# Allegro board Freescale_v1_4.brd
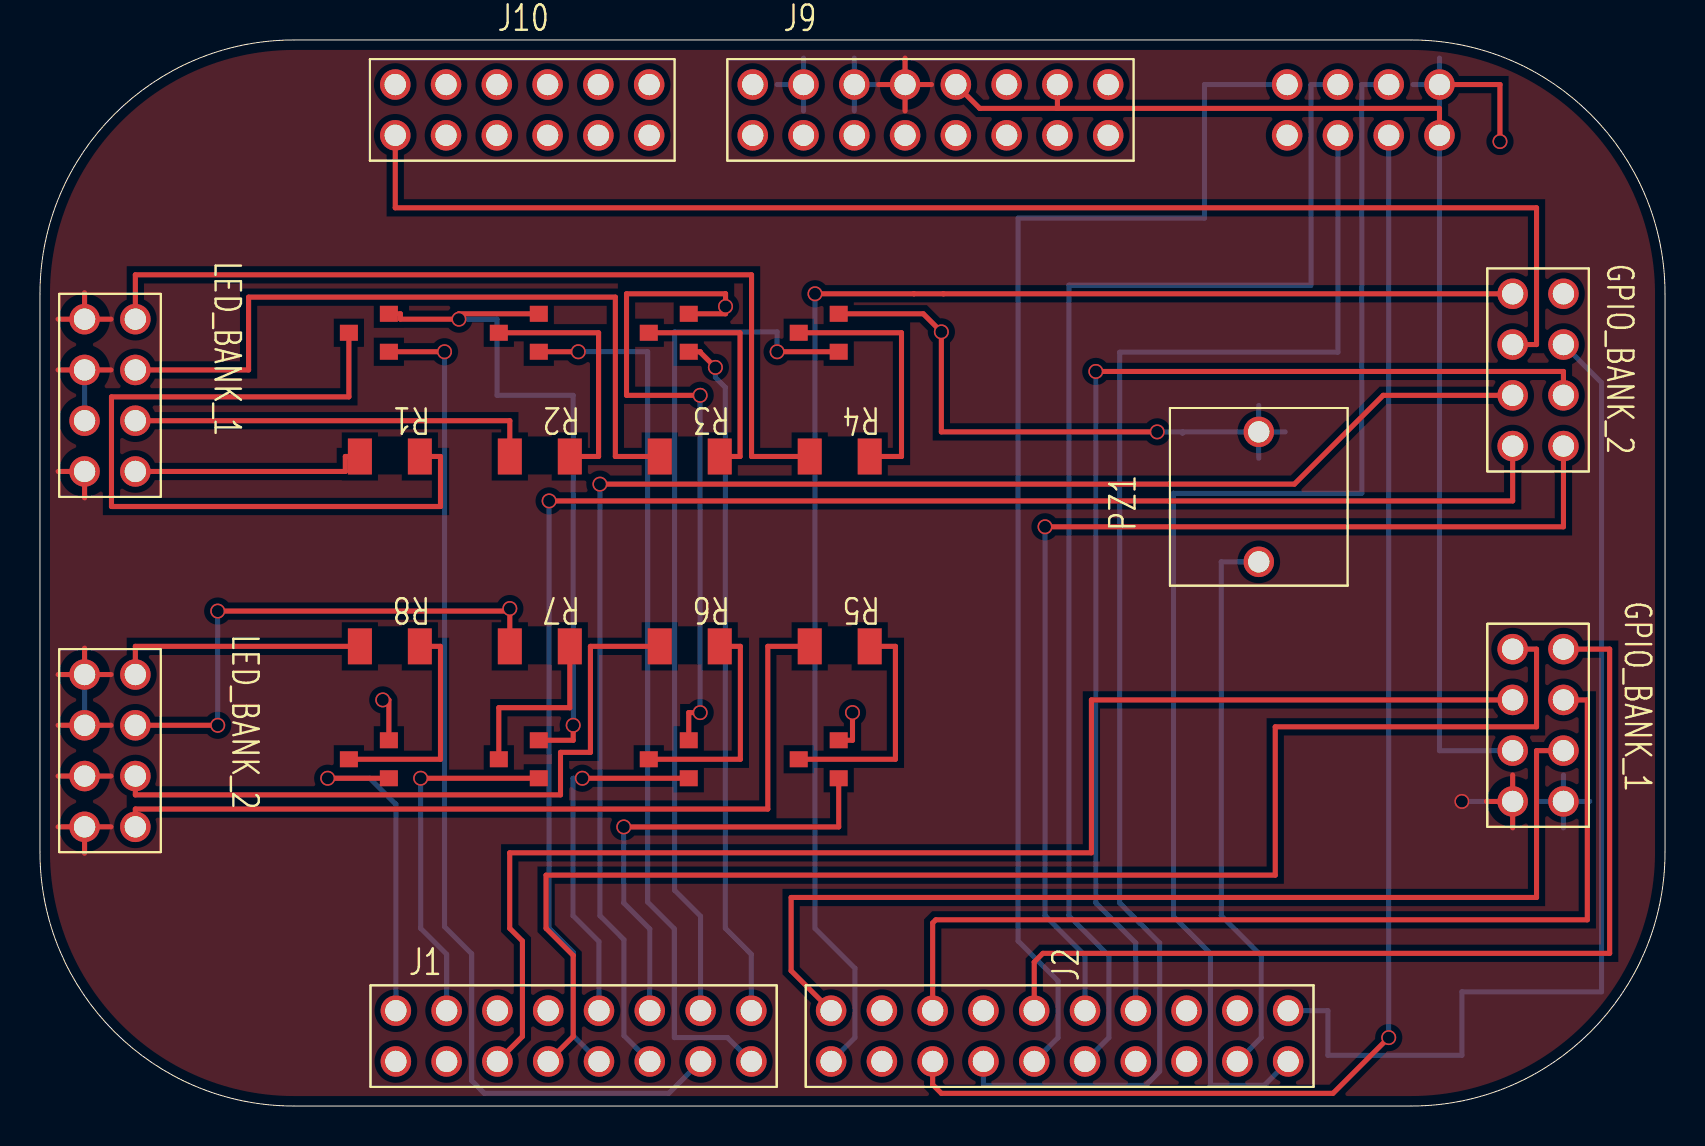
[diagram p0: board, top side]
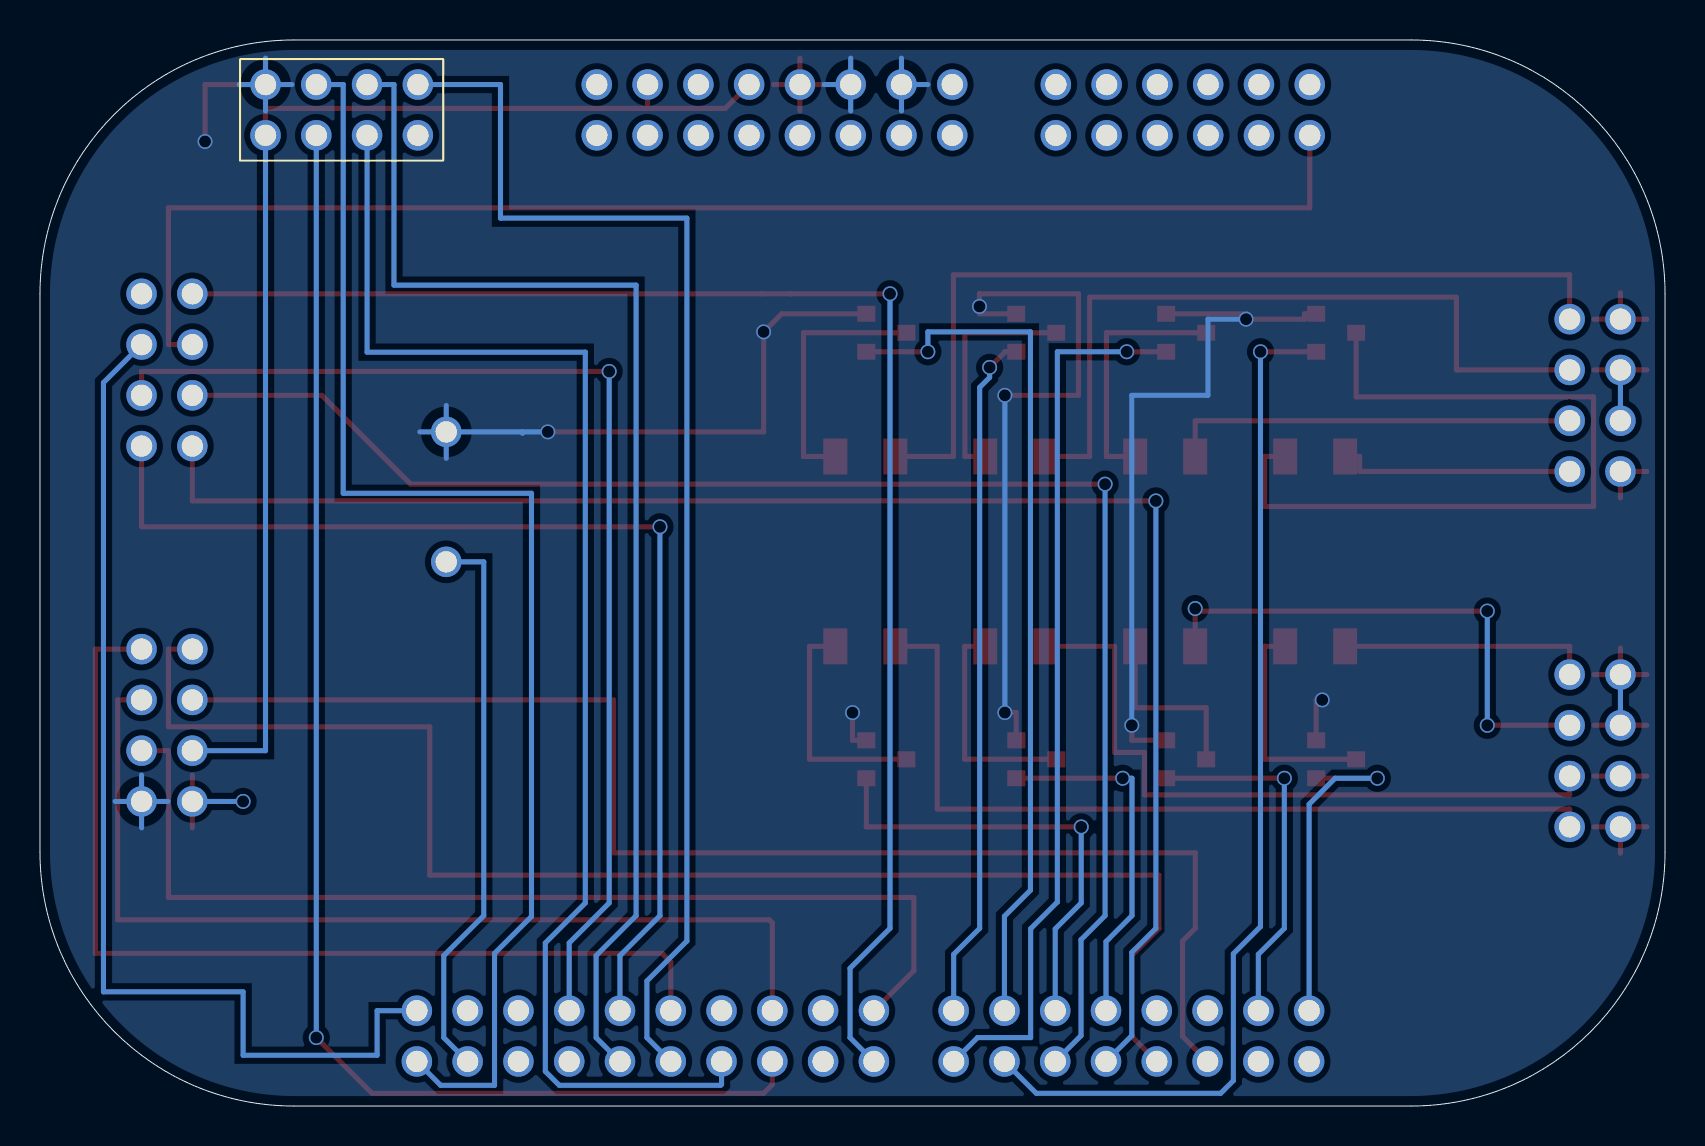
[diagram p1: board, bottom side, seen from below]

Outline 81.28 x 53.34 mm; copper layers: TOP, BOTTOM. Coordinates in mm from the lower left corner of the outline.
Outline path: 0,40.64 arc(3.72,49.62) 12.7,53.34 68.58,53.34 arc(77.56,49.62) 81.28,40.64 81.28,12.7 arc(77.56,3.72) 68.58,0 12.7,0 arc(3.72,3.72) 0,12.7 0,40.64

## Placement (name value [footprint] x y rotation side)
GPIO_BANK_1  HEADER 4X2  [JUMPER8]  73.66 15.24 0 top
GPIO_BANK_2  HEADER 4X2  [JUMPER8]  73.66 33.02 0 top
J1  HEADER 8X2  [JUMPER16]  17.8 2.23 0 top
J2  HEADER 10X2  [JUMPER20]  51 3.5 90 top
J9  J9  [JUMPER16]  35.65 48.57 0 top
J10  HEADER 6x2/SM  [JUMPER12]  24.12 49.84 90 top
J11  HEADER 4X2  [JUMPER8]  70 51.11 270 bottom
LED_BANK_1  HEADER 4X2  [JUMPER8]  2.23 31.75 0 top
LED_BANK_2  HEADER 4X2  [JUMPER8]  2.23 13.97 0 top
PZ1  PIEZO BUZZER_2  [DTH6-5MM]  60.96 30.48 90 top
Q1  MOSFET N  [TRANS]  37.5 37.34 0 top
Q2  MOSFET N  [TRANS]  30 37.34 0 top
Q3  MOSFET N  [TRANS]  22.5 37.34 0 top
Q4  MOSFET N  [TRANS]  15 37.34 0 top
Q5  MOSFET N  [TRANS]  37.5 16 0 top
Q6  MOSFET N  [TRANS]  30 16 0 top
Q7  MOSFET N  [TRANS]  22.5 16 0 top
Q8  MOSFET N  [TRANS]  15 16 0 top
R1  200  [SMD_RES_1206]  17.5 32.5 180 top
R2  200  [SMD_RES_1206]  25 32.5 180 top
R3  200  [SMD_RES_1206]  32.5 32.5 180 top
R4  200  [SMD_RES_1206]  40 32.5 180 top
R5  200  [SMD_RES_1206]  40 23 180 top
R6  200  [SMD_RES_1206]  32.5 23 180 top
R7  200  [SMD_RES_1206]  25 23 180 top
R8  200  [SMD_RES_1206]  17.5 23 180 top

## Library data of the parts
GPIO_BANK_1 GPIO_BANK_2 J11 LED_BANK_1 LED_BANK_2 = HEADER 4X2: User Part Number: ***
J1 J9 = HEADER 8X2_0: User Part Number: ***
J2 = HEADER 10X2_0
J10 = HEADER 6x2/SM_0
PZ1 = PIEZO BUZZER_0
Q1-Q8 = MOSFET N_1
R1-R8 = R

## Footprints (pads in the part's own frame, mm; a bottom-side part is the same pattern mirrored in y, then rotated)
DTH6-5MM
  round 1.524 hole 1.067: 1(-3.251,0) 2(3.251,0)
JUMPER8
  round 1.524 hole 1.067: 1(0,0) 2(2.54,0) 3(0,2.54) 4(2.54,2.54) 5(0,5.08) 6(2.54,5.08) 7(0,7.62) 8(2.54,7.62)
JUMPER12
  round 1.524 hole 1.067: 1(-1.27,6.35) 2(-1.27,3.81) 3(-1.27,1.27) 4(-1.27,-1.27) 5(-1.27,-3.81) 6(-1.27,-6.35) 7(1.27,-6.35) 8(1.27,-3.81) 9(1.27,-1.27) 10(1.27,1.27) 11(1.27,3.81) 12(1.27,6.35)
JUMPER16
  round 1.524 hole 1.067: 1(0,0) 2(2.54,0) 3(5.08,0) 4(7.62,0) 5(10.16,0) 6(12.7,0) 7(15.24,0) 8(17.78,0) 9(0,2.54) 10(2.54,2.54) 11(5.08,2.54) 12(7.62,2.54) 13(10.16,2.54) 14(12.7,2.54) 15(15.24,2.54) 16(17.78,2.54)
JUMPER20
  round 1.524 hole 1.067: 1(-1.27,11.43) 2(-1.27,8.89) 3(-1.27,6.35) 4(-1.27,3.81) 5(-1.27,1.27) 6(-1.27,-1.27) 7(-1.27,-3.81) 8(-1.27,-6.35) 9(-1.27,-8.89) 10(-1.27,-11.43) 11(1.27,-11.43) 12(1.27,-8.89) 13(1.27,-6.35) 14(1.27,-3.81) 15(1.27,-1.27) 16(1.27,1.27) 17(1.27,3.81) 18(1.27,6.35) 19(1.27,8.89) 20(1.27,11.43)
SMD_RES_1206
  rect 1.2x1.8 smd: 1(-1.5,0) 2(1.5,0)
TRANS
  rect 0.9x0.8 smd: 2(0.45,1.35) 4(2.45,2.3) 6(2.45,0.4)

## Nets
3.3V: GPIO_BANK_1.3 J9.13 J9.15 J11.2
5V: GPIO_BANK_1.1 J9.12 LED_BANK_1.1 LED_BANK_1.3 LED_BANK_1.5 LED_BANK_1.7 LED_BANK_2.1 LED_BANK_2.3 LED_BANK_2.5 LED_BANK_2.7
GND: GPIO_BANK_1.2 J9.10 J9.11 J11.1 PZ1.2 Q1.4(EMMITER) Q2.4(EMMITER) Q3.4(EMMITER) Q4.4(EMMITER) Q5.4(EMMITER) Q6.4(EMMITER) Q7.4(EMMITER) Q8.4(EMMITER)
GPIO-1: GPIO_BANK_1.4 J2.20
GPIO-2: GPIO_BANK_1.5 J1.3
GPIO-3: GPIO_BANK_1.6 J2.18
GPIO-4: GPIO_BANK_1.7 J1.4
GPIO-5: GPIO_BANK_1.8 J2.16
GPIO-6: GPIO_BANK_2.1 J1.5
GPIO-7: GPIO_BANK_2.2 J2.15
GPIO-8: GPIO_BANK_2.3 J1.6
GPIO-9: GPIO_BANK_2.4 J2.14
GPIO-10: GPIO_BANK_2.5 J10.1
GPIO-11: GPIO_BANK_2.6 J2.11
GPIO-12: GPIO_BANK_2.7 J2.1
LED-1: J1.7 Q4.6(BASE)
LED-2: J1.8 Q3.6(BASE)
LED-3: J1.16 Q2.6(BASE)
LED-4: J1.15 Q1.6(BASE)
LED-5: J1.14 Q5.6(BASE)
LED-6: J1.13 Q6.6(BASE)
LED-7: J1.10 Q7.6(BASE)
LED-8: J1.9 Q8.6(BASE)
PIEZO: J2.9 PZ1.1
RF-CE: J2.10 J11.3
RF-CSN: J2.3 J11.4
RF-MISO: J2.5 J11.7
RF-MOSI: J2.4 J11.6
RF-SCK: J2.6 J11.5
N09708: LED_BANK_1.4 R2.2
N10812: LED_BANK_1.6 R3.2
N10920: LED_BANK_1.8 R4.2
N11781: Q1.2(COLLECTOR) R4.1
N11991: LED_BANK_1.2 R1.2
N12934: LED_BANK_2.6 R7.2
N12980: LED_BANK_2.4 R6.2
N13010: LED_BANK_2.2 R5.2
N13042: Q5.2(COLLECTOR) R5.1
N13078: LED_BANK_2.8 R8.2
N096061: Q4.2(COLLECTOR) R1.1
N097021: Q3.2(COLLECTOR) R2.1
N107951: Q2.2(COLLECTOR) R3.1
N129261: Q8.2(COLLECTOR) R8.1
N129501: Q7.2(COLLECTOR) R7.1
N129721: Q6.2(COLLECTOR) R6.1

Pads without a net: GPIO_BANK_2 8; J1 1 2 11 12; J2 2 7 8 12 13 17 19; J9 1 2 3 4 5 6 7 8 9 14 16; J10 2 3 4 5 6 7 8 9 10 11 12; J11 8

## Via types
v1: diameter 0.75, hole 0.6, TOP to BOTTOM, 28 vias

## Routing (per net, layer and track width the routed paths; a pad name or vN(x,y) marks a point on that pad's centre or on a via; arc(x,y) is an arc through that point)
3.3V: length 61.7
  TOP w0.254: 50.89,49.93 50.87,49.92 47,49.92 J9.13 ; 50.89,49.93 50.91,49.92 70,49.92 J11.2 ; 50.89,49.93 J9.15
  BOTTOM w0.254: J11.2 70,17.78 GPIO_BANK_1.3
5V: length 39.3
  TOP w0.254: LED_BANK_1.7 2.23,40.69 ; LED_BANK_1.7 0.91,39.37 ; LED_BANK_1.7 3.55,39.37 ; 0.91,13.97 LED_BANK_2.1 ; LED_BANK_2.1 2.23,12.65 ; LED_BANK_2.1 3.55,13.97 ; J9.12 44.59,51.11 ; J9.12 41.95,51.11 ; J9.12 43.27,52.43 ; J9.12 43.27,49.79 ; 3.55,16.51 LED_BANK_2.3 0.91,16.51 ; 0.91,19.05 LED_BANK_2.5 3.55,19.05 ; 0.91,36.83 LED_BANK_1.5 3.55,36.83 ; 0.91,21.59 LED_BANK_2.7 ; LED_BANK_2.7 2.23,22.91 ; LED_BANK_2.7 3.55,21.59 ; 2.23,30.43 LED_BANK_1.1 0.91,31.75 ; GPIO_BANK_1.1 73.66,16.56 ; GPIO_BANK_1.1 72.34,15.24 ; GPIO_BANK_1.1 73.66,13.92
  BOTTOM w0.254: LED_BANK_1.5 LED_BANK_1.3 ; LED_BANK_2.5 LED_BANK_2.7 ; GPIO_BANK_1.1 v1(71.12,15.24)
GND: length 130.2
  TOP w0.254: Q2.4 34.29,39.64 v1(34.29,40.01) 34.29,40.64 34.29,40.64 34.29,40.64 29.34,40.64 29.34,35.56 v1(33.02,35.56) ; Q4.4 18.03,39.64 18.03,39.37 v1(20.95,39.37) 20.95,39.64 Q3.4 ; v1(73.03,48.26) 73.03,51.11 J11.1 ; Q6.4 32.45,19.68 v1(33.02,19.68) ; Q5.4 40.64,18.3 v1(40.64,19.68) ; Q1.4 44.18,39.64 v1(45.09,38.73) 45.09,33.73 v1(55.88,33.73) ; Q7.4 26.67,18.3 v1(26.67,19.05) ; v1(17.14,20.32) 17.45,20.32 Q8.4
  BOTTOM w0.254: 38.19,49.79 J9.10 ; J9.10 38.19,52.43 ; J9.10 36.87,51.11 ; v1(33.02,19.68) v1(33.02,35.56) ; 70,49.79 J11.1 ; J11.1 68.68,51.11 ; J11.1 70,52.43 ; J11.1 71.32,51.11 ; v1(20.95,39.37) 22.86,39.37 22.86,35.56 26.67,35.56 v1(26.67,19.05) ; PZ1.2 62.28,33.73 ; PZ1.2 57.15,33.73 ; PZ1.2 60.96,32.41 ; PZ1.2 60.96,35.05 ; 57.15,33.73 v1(55.88,33.73) 55.88,33.66 ; 57.15,33.73 57.15,33.66 ; 40.73,49.79 J9.11 ; J9.11 40.73,52.43 ; J9.11 42.05,51.11 ; 74.88,15.24 GPIO_BANK_1.2 ; GPIO_BANK_1.2 77.52,15.24 ; GPIO_BANK_1.2 76.2,16.56 ; GPIO_BANK_1.2 76.2,13.92
GPIO-1: length 52.5
  TOP w0.254: GPIO_BANK_1.4 74.85,17.78 74.85,10.43 37.57,10.43 37.57,6.77 J2.20
GPIO-2: length 69
  TOP w0.254: J1.3 24.13,3.48 24.13,8.26 23.5,8.89 23.5,12.67 52.59,12.67 52.59,20.32 GPIO_BANK_1.5
GPIO-3: length 49.4
  TOP w0.254: GPIO_BANK_1.6 77.39,20.32 77.39,9.32 44.81,9.32 44.65,9.16 J2.18
GPIO-4: length 72.4
  TOP w0.254: J1.4 26.67,3.48 26.67,7.53 25.31,8.89 25.31,11.55 61.78,11.55 61.78,18.97 74.85,18.97 74.85,22.86 GPIO_BANK_1.7
GPIO-5: length 48.9
  TOP w0.254: GPIO_BANK_1.8 78.51,22.86 78.51,7.64 50.16,7.64 49.73,7.21 J2.16
GPIO-6: length 80
  TOP w0.254: v1(25.47,30.28) 73.66,30.28 GPIO_BANK_2.1
  BOTTOM w0.254: J1.5 26.67,3.52 26.67,7.69 25.47,8.89 v1(25.47,30.28)
GPIO-7: length 55
  TOP w0.254: v1(50.27,28.98) 76.2,28.98 GPIO_BANK_2.2
  BOTTOM w0.254: J2.15 52.27,7.53 50.27,9.53 v1(50.27,28.98)
GPIO-8: length 77.4
  TOP w0.254: GPIO_BANK_2.3 67.18,35.56 62.74,31.11 v1(28.01,31.11)
  BOTTOM w0.254: v1(28.01,31.11) 28.01,9.53 29.21,8.32 29.21,3.52 J1.6
GPIO-9: length 57.4
  TOP w0.254: GPIO_BANK_2.4 76.2,36.75 v1(52.81,36.75)
  BOTTOM w0.254: v1(52.81,36.75) 52.81,10.16 54.81,8.16 J2.14
GPIO-10: length 68.7
  TOP w0.254: J10.1 17.77,44.94 74.85,44.94 74.85,38.1 GPIO_BANK_2.5
GPIO-11: length 54.3
  BOTTOM w0.254: J2.11 64.42,4.77 64.42,2.54 71.12,2.54 71.12,5.71 78.11,5.71 78.11,36.2 GPIO_BANK_2.6
GPIO-12: length 74.6
  TOP w0.254: v1(38.76,40.64) 43.71,40.64 GPIO_BANK_2.7
  BOTTOM w0.254: v1(38.76,40.64) 38.76,8.89 40.76,6.89 40.76,3.42 J2.1
LED-1: length 52.2
  TOP w0.254: Q4.6 v1(20.23,37.74)
  BOTTOM w0.254: v1(20.23,37.74) 20.23,8.98 21.59,7.62 21.59,1.27 22.23,0.64 31.45,0.64 J1.7
LED-2: length 44.7
  TOP w0.254: Q3.6 v1(26.92,37.74)
  BOTTOM w0.254: J1.8 34.39,3.42 31.73,3.42 31.73,8.87 30.39,10.21 30.39,37.74 v1(26.92,37.74)
LED-3: length 34.6
  TOP w0.254: v1(33.78,36.96) 33.03,37.71 33.03,37.73 33.02,37.74 Q2.6
  BOTTOM w0.254: v1(33.78,36.96) 33.78,36.45 34.28,35.96 34.28,8.89 35.58,7.59 J1.16
LED-4: length 43.7
  TOP w0.254: Q1.6 v1(36.87,37.74)
  BOTTOM w0.254: J1.15 33.04,9.49 31.74,10.79 31.74,38.73 36.87,38.73 v1(36.87,37.74)
LED-5: length 22.9
  TOP w0.254: Q5.6 39.95,13.96 v1(29.2,13.96)
  BOTTOM w0.254: v1(29.2,13.96) 29.2,10.16 30.5,8.86 J1.14
LED-6: length 18
  TOP w0.254: Q6.6 v1(27.13,16.4)
  BOTTOM w0.254: J1.13 27.96,8.22 26.66,9.53 26.66,16.4 v1(27.13,16.4)
LED-7: length 18.1
  TOP w0.254: Q7.6 v1(19.04,16.4)
  BOTTOM w0.254: v1(19.04,16.4) 19.04,8.89 20.34,7.59 J1.10
LED-8: length 17.3
  TOP w0.254: Q8.6 v1(14.39,16.4)
  BOTTOM w0.254: J1.9 17.8,15.1 16.5,16.4 v1(14.39,16.4)
PIEZO: length 28.2
  BOTTOM w0.254: J2.9 61.08,3.42 61.08,7.53 59.08,9.53 59.08,27.23 PZ1.1
RF-CE: length 66
  BOTTOM w0.254: J11.3 66.11,51.11 66.11,30.66 56.7,30.66 56.7,9.48 58.54,7.63 58.54,1.04 61.24,1.04 J2.10
RF-CSN: length 70.5
  TOP w0.254: v1(67.46,3.42) 64.67,0.64 45.09,0.64 44.65,1.07 J2.3
  BOTTOM w0.254: J11.4 v1(67.46,3.42)
RF-MISO: length 63.7
  BOTTOM w0.254: J11.7 58.25,51.11 58.25,44.42 48.92,44.42 48.92,8.26 50.92,6.25 50.92,3.42 J2.5
RF-MOSI: length 68.8
  BOTTOM w0.254: J11.6 64.92,37.72 54,37.72 54,10.16 56,8.16 56,1.74 55.3,1.04 47.24,1.04 47.19,1.09 J2.4
RF-SCK: length 63.7
  BOTTOM w0.254: J11.5 63.57,51.11 63.57,41.07 51.46,41.07 51.46,9.53 53.46,7.53 53.46,3.42 J2.6
N09708: length 20.5
  TOP w0.254: R2.2 23.5,34.29 LED_BANK_1.4
N10812: length 37.8
  TOP w0.254: LED_BANK_1.6 10.43,36.83 10.43,40.47 28.78,40.47 28.78,32.5 R3.2
N10920: length 45
  TOP w0.254: LED_BANK_1.8 4.77,41.59 35.59,41.59 35.59,32.5 R4.2
N11781: length 12.9
  TOP w0.254: R4.1 43.09,32.5 43.09,38.69 Q1.2
N11991: length 12
  TOP w0.254: R1.2 15.27,32.5 15.27,31.75 LED_BANK_1.2
N12934: length 26.6
  TOP w0.254: R7.2 v1(23.5,24.89) ; v1(23.5,24.89) 23.5,24.77 ; v1(23.5,24.89) 23.5,24.77 ; LED_BANK_2.6 v1(8.89,19.05) ; v1(8.89,24.77) 23.5,24.77
  BOTTOM w0.254: v1(8.89,19.05) v1(8.89,24.77)
N12980: length 34.6
  TOP w0.254: R6.2 27.53,23 27.53,17.7 26.04,17.7 26.04,15.57 4.77,15.57 LED_BANK_2.4
N13010: length 42.8
  TOP w0.254: R5.2 36.4,23 36.4,14.86 4.77,14.86 LED_BANK_2.2
N13042: length 11.8
  TOP w0.254: Q5.2 42.79,17.35 42.79,23 R5.1
N13078: length 12.6
  TOP w0.254: R8.2 4.77,23 LED_BANK_2.8
N096061: length 40.6
  TOP w0.254: R1.1 20.03,32.5 20.03,30 3.58,30 3.58,35.48 15.45,35.48 Q4.2
N097021: length 12.6
  TOP w0.254: R2.1 27.94,32.5 27.94,38.69 Q3.2
N107951: length 11.8
  TOP w0.254: Q2.2 35.02,38.69 35.02,32.5 R3.1
N129261: length 11.3
  TOP w0.254: R8.1 20.03,23 20.03,17.35 Q8.2
N129501: length 9.2
  TOP w0.254: R7.1 26.5,19.93 22.95,19.93 Q7.2
N129721: length 11.3
  TOP w0.254: R6.1 35.03,23 35.03,17.35 Q6.2

## Copper pours and planes (outline as drawn; the poured copper is in the pictures)
5V on TOP: 80.78,12.7 77.21,4.07 68.58,0.5 12.7,0.5 4.07,4.07 0.5,12.7 0.5,40.64 4.07,49.27 12.7,52.84 68.58,52.84 77.21,49.27 80.78,40.64
GND on BOTTOM: 80.78,12.7 77.21,4.07 68.58,0.5 12.7,0.5 4.07,4.07 0.5,12.7 0.5,40.64 4.07,49.27 12.7,52.84 68.58,52.84 77.21,49.27 80.78,40.64
